# EAGLE board TLE4476 (EAGLE 6.3)
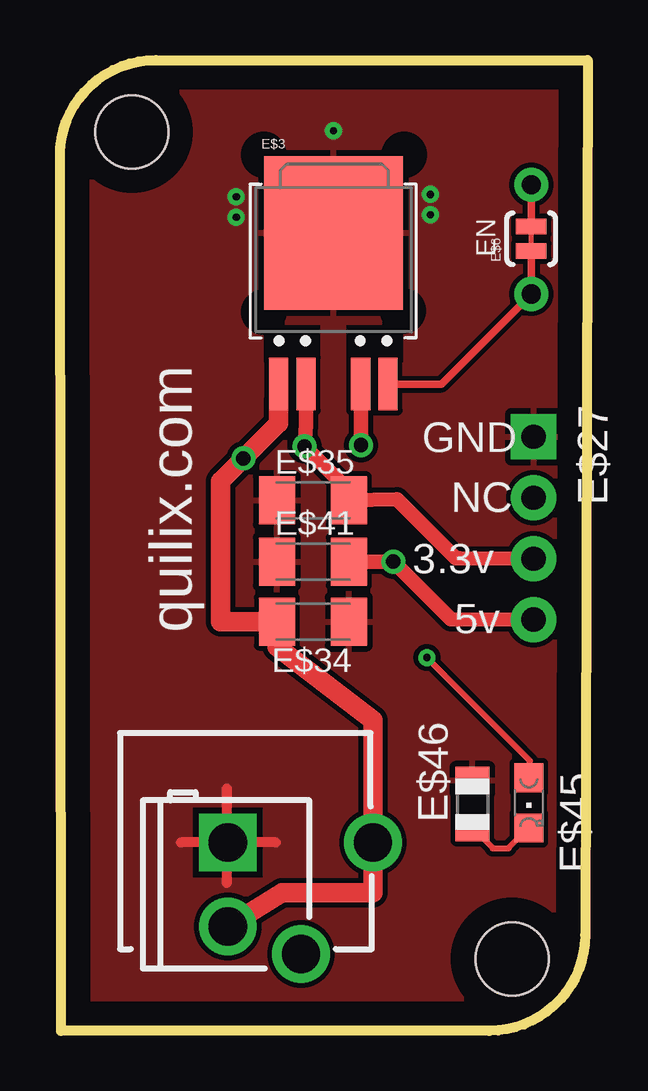
[diagram p0: board, top side]
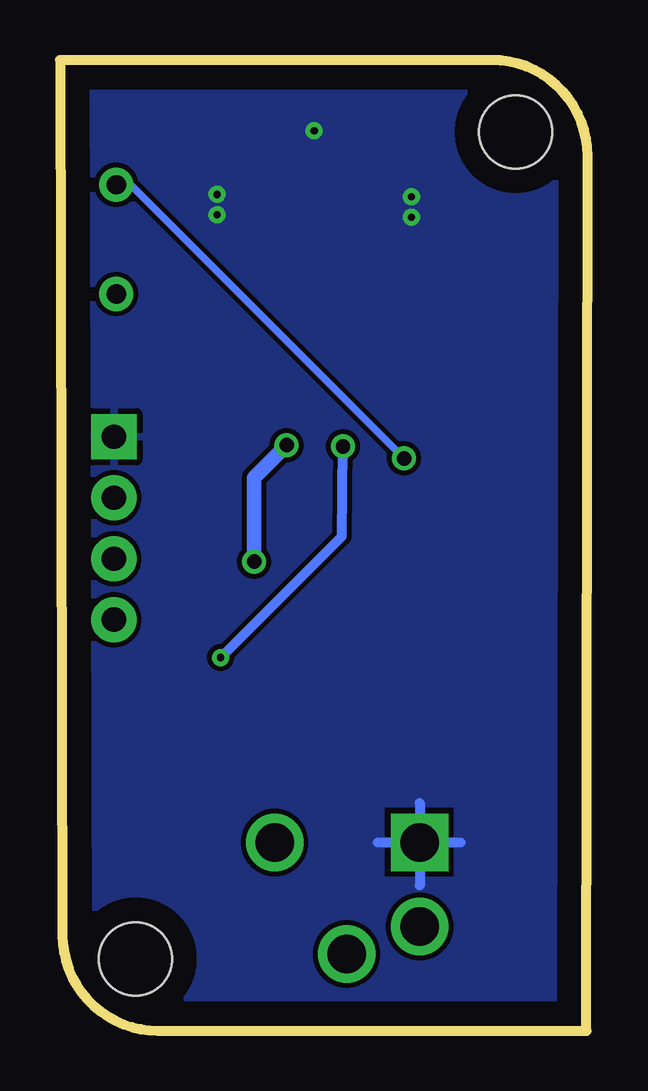
[diagram p1: board, bottom side, seen from below]

Size 22 x 40.45 mm. Coordinates in mm from the lower left corner, seen from the top.
Outline: 0.05,0 0,36.45 arc-90 4,40.45 22,40.45 21.9,4 arc-90 17.9,0 0.05,0
Copper layers (1*16): Top 0.035mm / dielectric 1.5mm / Bottom 0.035mm
Design rules "default *": minimum track width 10mil, minimum drill 24mil, track to track 8mil, track to pad 8mil, pad to pad 8mil, via to via 8mil, smd to smd 8mil, copper to edge 40mil, drill to drill 8mil, minimum pad ring 10mil, minimum via ring 8mil, stop-mask expansion 4mil, vias tented up to drill 0.3mm, thermal gap 10mil
tRestrict: area 8.5,27.8 to 10.9,29.4; area 11.9,27.8 to 14.3,29.4; area 16.3,9 to 18.1,9.9; area 18.8,9 to 20.3,10; area 7.8,35.8 to 9.2,37.2; area 13.6,35.8 to 15.1,37.2; area 7.8,29.2 to 9.2,30.7; area 13.6,29.2 to 15.1,30.7; area 5.6,6.4 to 8.4,9.3
bRestrict: area 5.6,6.4 to 8.5,9.3

## Footprints (pad centres in the part's own frame; a part is rotated, then mirrored left to right if it is on the bottom)
DPAK-5 = smd 0.8 x 2.2: ADJ 2.28,-5.3; EN -2.28,-5.3; VIN -1.14,-5.3; VOUT 1.14,-5.3 | smd 5.8 x 6.4: GND 0,1
SJ_2S-TRACE = smd 0.635 x 1.27: 1 -0.508,0; 2 0.508,0
STAND-OFF-TIGHT = hole 3.048: 0,0
1X04_NO_SILK = drill 1.016 pad 1.88 square: 1 0,0 | drill 1.016 pad 1.88: 2 2.54,0; 3 5.08,0; 4 7.62,0
C1206K = smd 1.5 x 2: 1 -1.5,0; 2 1.5,0
CHIPLED_0805 = smd 1.2 x 1.2: A 0,-1.05; C 0,1.05
R0805 = smd 1.1 x 1.4: 1 -1,0; 2 1,0

## Placement (x,y rotation side)
E$3  [DPAK-5]  11.4,32.25 0 top
E$6  [SJ_2S-TRACE]  19.65,33 90 top
E$11  [STAND-OFF-TIGHT]  18.85,3 0 top
E$12  [STAND-OFF-TIGHT]  3,37.45 0 top
E$27  [1X04_NO_SILK]  19.75,24.75 270 top
E$34  [C1206K]  10.55,17.05 180 top
E$35  [C1206K]  10.55,22.1 0 top
E$41  [C1206K]  10.55,19.55 0 top
E$45  [CHIPLED_0805]  19.55,9.5 180 top
E$46  [R0805]  17.2,9.45 90 top

## Library data of the parts
E$3 E$6 E$27 = SparkFun
E$11 E$12 = SparkFun-Electromechanical
E$34 E$35 E$41 E$45 E$46 = adafruit

## Nets
3.3V: E$3.VIN E$27.3 E$35.2 E$45.A
5V: E$3.VOUT E$27.4 E$41.2
EN: E$3.ADJ E$6.1
GND: E$3.GND E$27.1 E$34.1 E$35.1 E$41.1 E$46.2
S$4: E$45.C E$46.1
VIN: E$3.EN E$6.2 E$34.2

## Tracks (layer width: path | path; a pad name or v marks a point on that pad's centre or on a via)
3.3V  (via drill 0.3, 0.6)
  Top 0.254: E$45.A 19.6,11.25 v15.3,15.55
  Top 0.61: E$3.VIN 10.25,25.25 v10.2,24.35 12.05,22.5 E$35.2 14.05,22.15 16.5,19.7 16.65,19.7 E$27.3
  Bottom 0.406: v15.3,15.55 10.25,20.6 v10.2,24.35
5V  (via drill 0.6)
  Top 0.61: E$41.2 v13.9,19.55 16.3,17.15 E$27.4 | E$3.VOUT 12.55,25.3 v12.55,24.4
  Bottom 0.61: v12.55,24.4 13.9,23.05 v13.9,19.55
EN  (via drill 0.8 pad 1.42)
  Top 0.305: E$6.1 v19.65,30.7 15.9,26.95 E$3.ADJ
GND  (via drill 0.3, 1.6)
  Top 0.406: 6.95,10.1 6.95,6.15 | 9,7.85 v7,7.85 5.05,7.85
  Bottom 0.406: 8.75,7.85 v7,7.85 | v7,7.85 5.3,7.85 | 7,9.5 v7,7.85 | v7,7.85 7,6.05
  other vias: 11.4,37.5 7.35,34.75 15.45,34.85 7.35,33.9 15.45,34
  pour Top: 0.75,0.75 17.75,0.75 arc90 21.2,2.25 21.3,39.4 arc90 21.15,39.6 2.45,39.55 arc90 0.7,35.7
  pour Bottom: 0.6,0.8 17.35,0.7 arc90 21.15,2.6 21.25,39.7 2.85,39.65 arc90 0.55,35.9
S$1
  Top 0.61: 19.7,22.21 19.69,22.2
S$3  (via drill 1.6)
  other vias: 10.05,3.2
S$4
  Top 0.254: E$46.1 18.05,7.6 18.7,7.6 E$45.C
S$6  (via drill 1.6)
  other vias: 13.05,7.85
S$7  (via drill 1.6)
  other vias: 7,4.35
VIN  (via drill 0.6, 0.8 pad 1.42)
  Top 0.305: E$6.2 v19.65,35.25
  Top 0.61: E$3.EN 9.12,26.27
  Top 0.813: 7,4.35 9.25,5.75 13.05,5.75 13.05,12.95 9.05,16 E$34.2 6.7,17.05 6.7,22.9 v7.65,23.85 9.12,25.32 9.12,26.27
  Bottom 0.305: v7.65,23.85 19.05,35.25 v19.65,35.25

## Text on the board
_tsilk: EN | GND | NC | 3.3v | quilix.com | 5v